# Altium PCB sz1v5.PcbDoc
Units mil, origin at the board's own origin, x right, y up, seen from the top; angles counter-clockwise.
Board outline 1350 x 850 mil, 2 copper layers (Top Layer, Bottom Layer); 1 components, 0 nets, 33 pads, 0 vias.
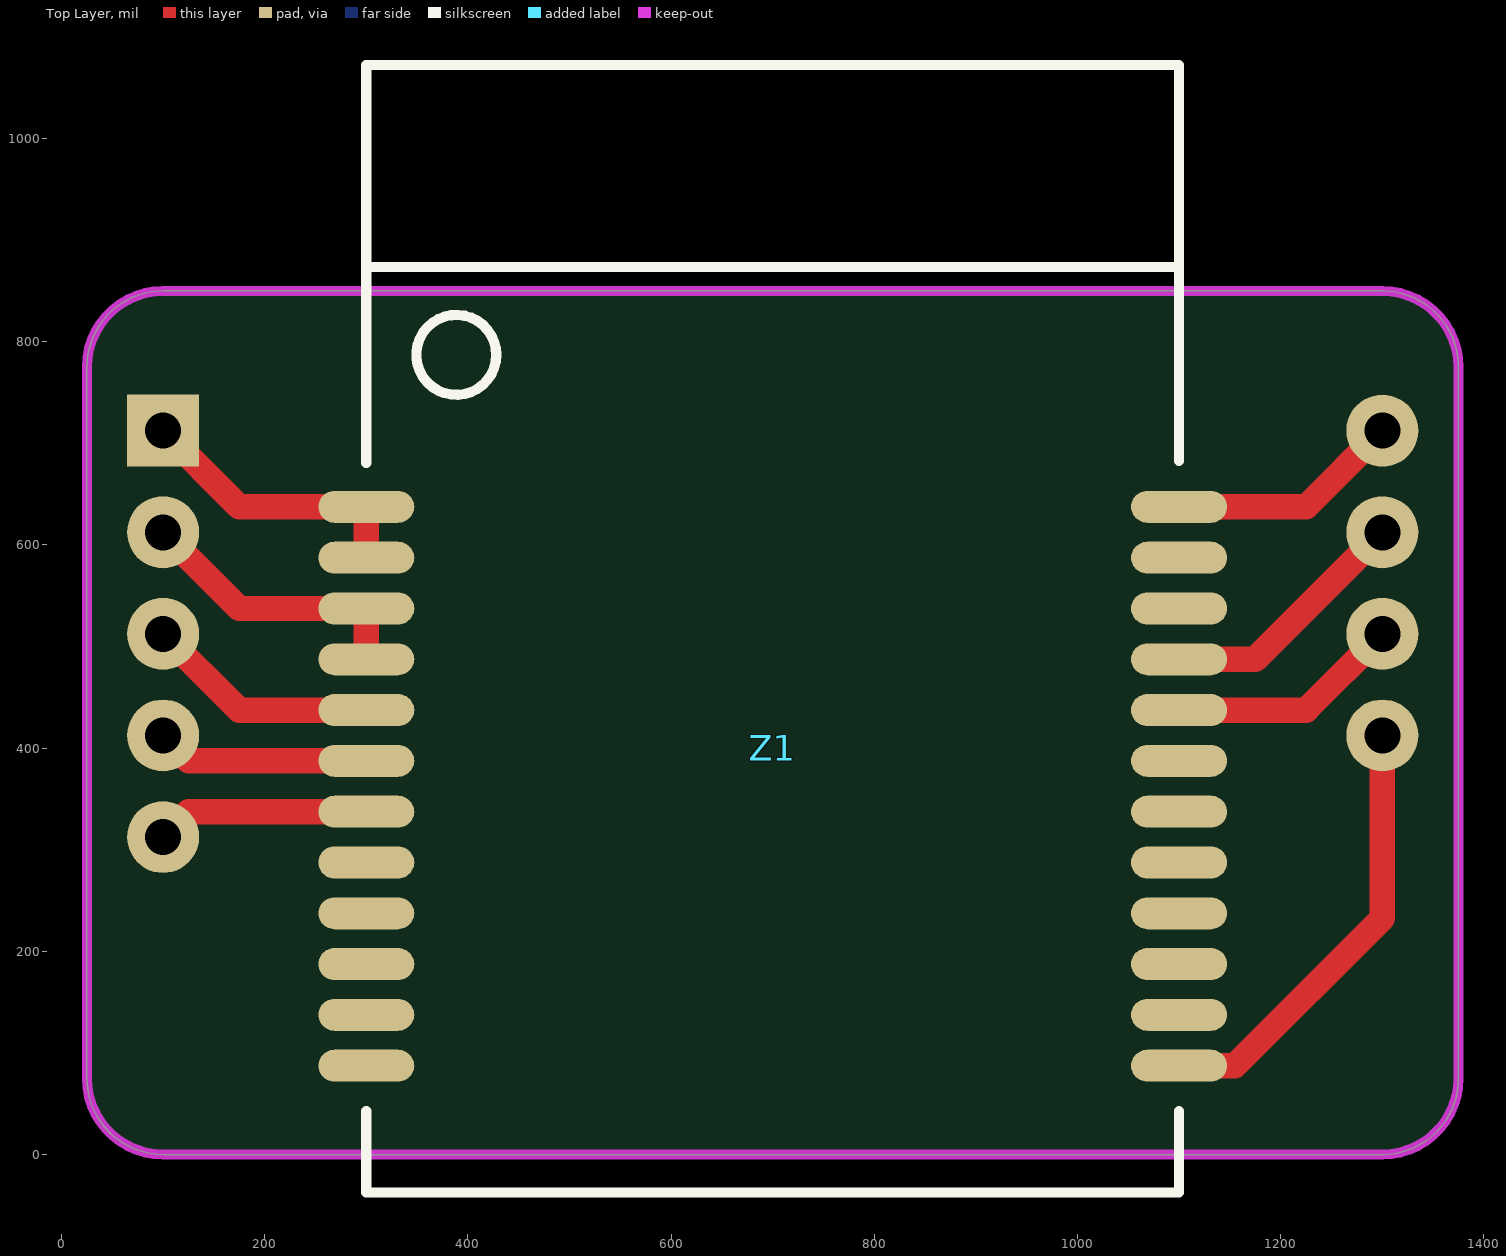
[diagram p0: Top Layer view]
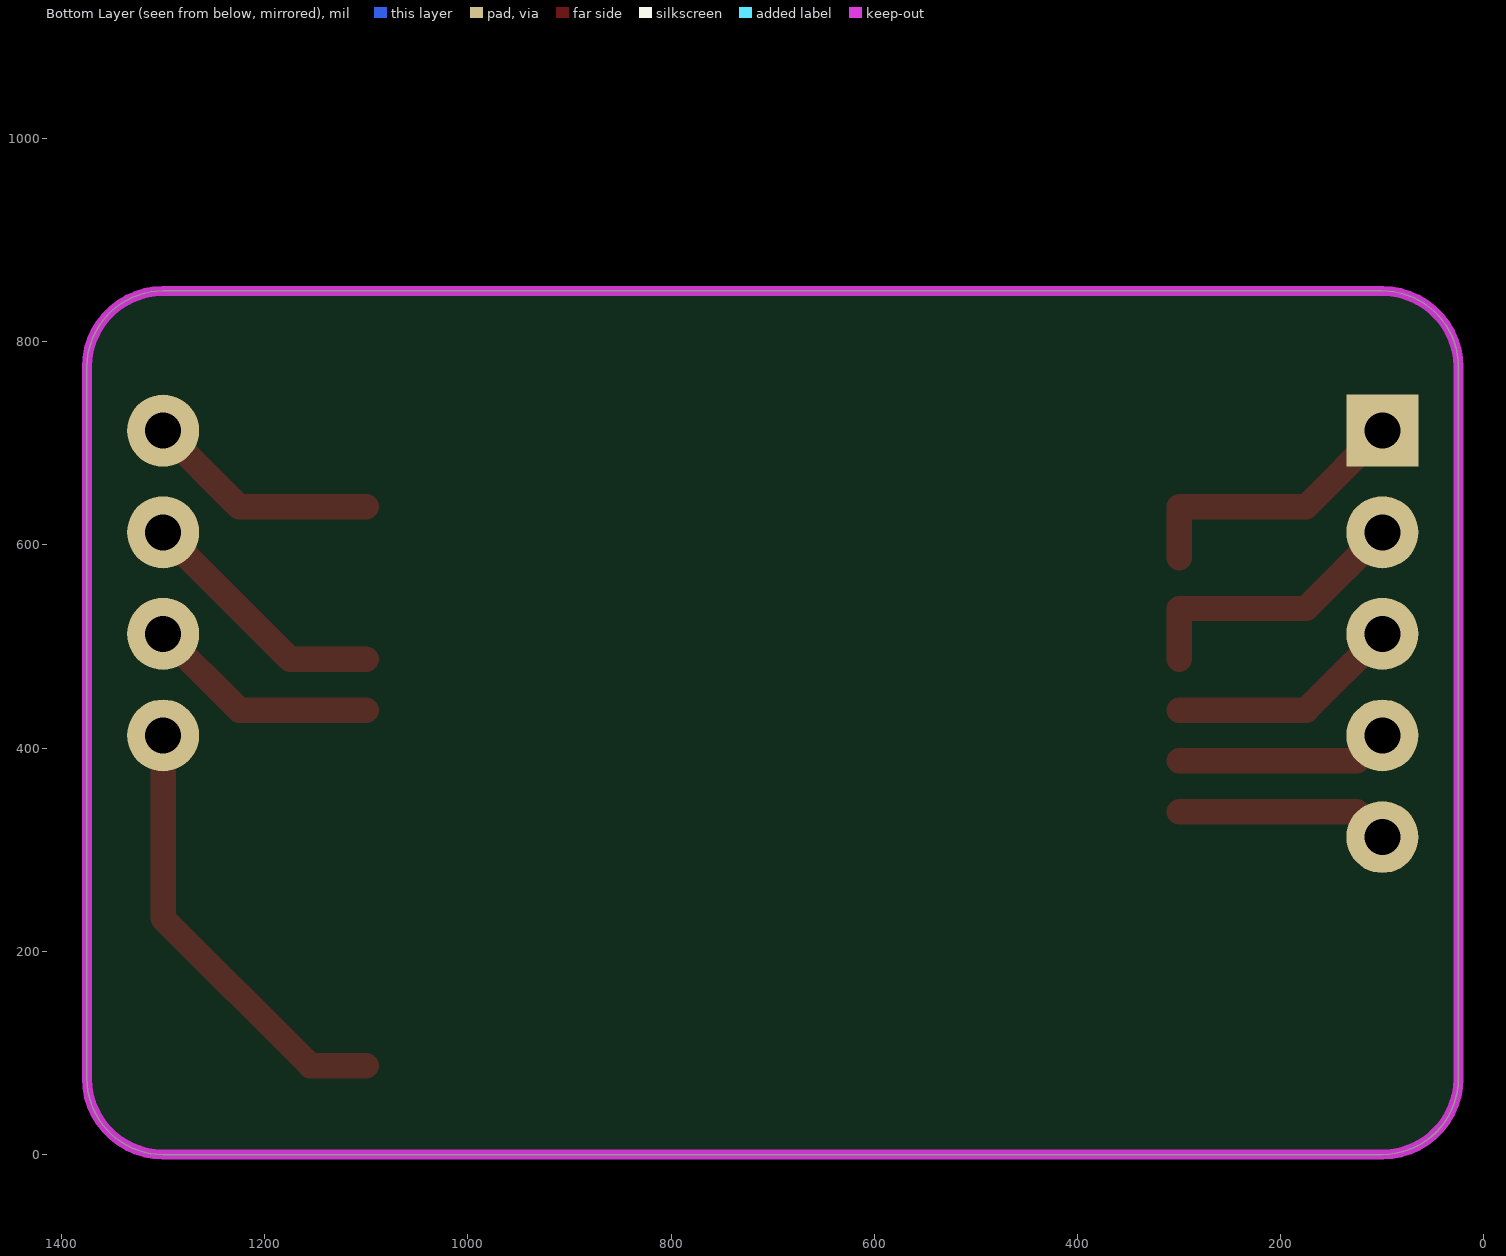
[diagram p1: Bottom Layer view, seen from below]

## Layer stack, top to bottom
Top Solder: solder mask 0.4, Solder Resist, Dk 3.5
Top Layer: signal copper 1.4
Dielectric 1: dielectric 12.6, FR-4, Dk 4.8
Bottom Layer: signal copper 1.4
Bottom Solder: solder mask 0.4, Solder Resist, Dk 3.5

## Board outline
25,75 25,775 cw(c100,775) 100,850 1300,850 cw(c1300,775) 1375,775 1375,75 cw(c1300,75) 1300,0 100,0 cw(c100,75)

## Design rules (kind name [scope] priority, off if disabled: settings)
Clearance [All] p1: gap=5 ignorepadtopadclearanceinfootprint=TRUE except(10: Track-THPad Track-Poly SMDPad-Poly THPad-Poly Via-Poly; 30: Poly-Region)
ComponentClearance [All] p1: gap=0 collisioncheckmode=3 verticalgap=0 showdistances=FALSE
HoleSize [All] p1: absolutevalues=TRUE maxlimit=150 minlimit=1 maxpercent=80.000 minpercent=20.000
MinimumSolderMaskSliver [All] p1: minsoldermaskwidth=1
PolygonConnect [All] p1: connectstyle=Relief reliefconductorwidth=10 reliefentries=4 polygonreliefangle="90 Angle" airgapwidth=10
RoutingVias [All] p1: holewidth=10 width=20 viastyle="Through Hole" minholewidth=5 minwidth=10 maxholewidth=20 maxwidth=50
SilkToSilkClearance [All] p1: silktosilkclearance=5
SilkToSolderMaskClearance [IsPad] p1: minsilkscreentomaskgap=1 clearancetoexposedcopper=TRUE
SolderMaskExpansion [All] p1: expansion=4 istentingtop=FALSE
Width [All] p1: maxlimit=100 minlimit=10 preferedwidth=20
25 further rules are at their usual default settings.

## Components (designator, comment, footprint, x,y, rotation, side; value= is the part's Value field where it differs from the comment)
Z1 "SZ1V5" SZ1V5_PINOUT 700,400 r0 top

## Footprints (in the part's own frame and the unit in brackets; to place one, negate y for a bottom-side part, rotate by r counter-clockwise, add the part's x,y. Pads: shape width x height; smd on the part's side, far side on the other; paste and mask are expansions set on the pad)
SZ1V5_PINOUT [mm]
  rect 1.8x1.8 hole 0.9: 1(-15.24,7.938)
  rrect100% 2.4x0.8 smd: 1(-10.16,6.032) 2(-10.16,4.763) 3(-10.16,3.492) 4(-10.16,2.222) 5(-10.16,0.953) 6(-10.16,-0.318) 7(-10.16,-1.587) 8(-10.16,-2.857) 9(-10.16,-4.127) 10(-10.16,-5.397) 11(-10.16,-6.667) 12(-10.16,-7.938) 13(10.16,6.032) 14(10.16,4.763) 15(10.16,3.492) 16(10.16,2.222) 17(10.16,0.953) 18(10.16,-0.318) 19(10.16,-1.587) 20(10.16,-2.857) 21(10.16,-4.127) 22(10.16,-5.397) 23(10.16,-6.667) 24(10.16,-7.938)
  round 1.8 hole 0.9: 3(-15.24,5.397) 5(-15.24,2.857) 6(-15.24,0.318) 7(-15.24,-2.222) 13(15.24,7.938) 16(15.24,5.397) 17(15.24,2.857) 24(15.24,0.318)
  Top Layer lines w0.635: -15.24,-2.222 -14.605,-1.587 -10.16,-1.587 ; -15.24,0.318 -14.605,-0.318 -10.16,-0.318 ; -15.24,2.857 -13.335,0.953 -10.16,0.953 ; -15.24,5.397 -13.335,3.492 -10.16,3.492 -10.16,2.222 ; -15.24,7.938 -13.335,6.032 -10.16,6.032 -10.16,4.763 ; 10.16,-7.938 11.557,-7.938 15.24,-4.255 15.24,0.318 ; 10.16,0.953 13.335,0.953 15.24,2.857 ; 10.16,2.222 12.065,2.222 15.24,5.397 ; 10.16,6.032 13.335,6.032 15.24,7.938
  silkscreen extent -10.16,-11.11 10.16,17.08

## Part data
Z1: library part SZ1V5_Alt

## Nets (pads, with @x,y where several pads share a name; then routed paths per layer and width w, separated by ;. In a path a pad name is that pad's centre, name@x,y a point inside that pad or via, vN(x,y) a via of type N, cw(c..) or ccw(c..) an arc to the next point about the centre after c; other vN are vias at no path point)
pads on no net: Z1.1 Z1.2 Z1.3 Z1.4 Z1.5 Z1.6 Z1.7 Z1.8 Z1.9 Z1.10 Z1.11 Z1.12 Z1.13 Z1.14 Z1.15 Z1.16 Z1.17 Z1.18 Z1.19 Z1.20 Z1.21 Z1.22 Z1.23 Z1.24

## Keep-outs
Keep-Out Layer:
  the board outline again, w10